# EAGLE board CapGrid4x4V1 (EAGLE 6.5.0)
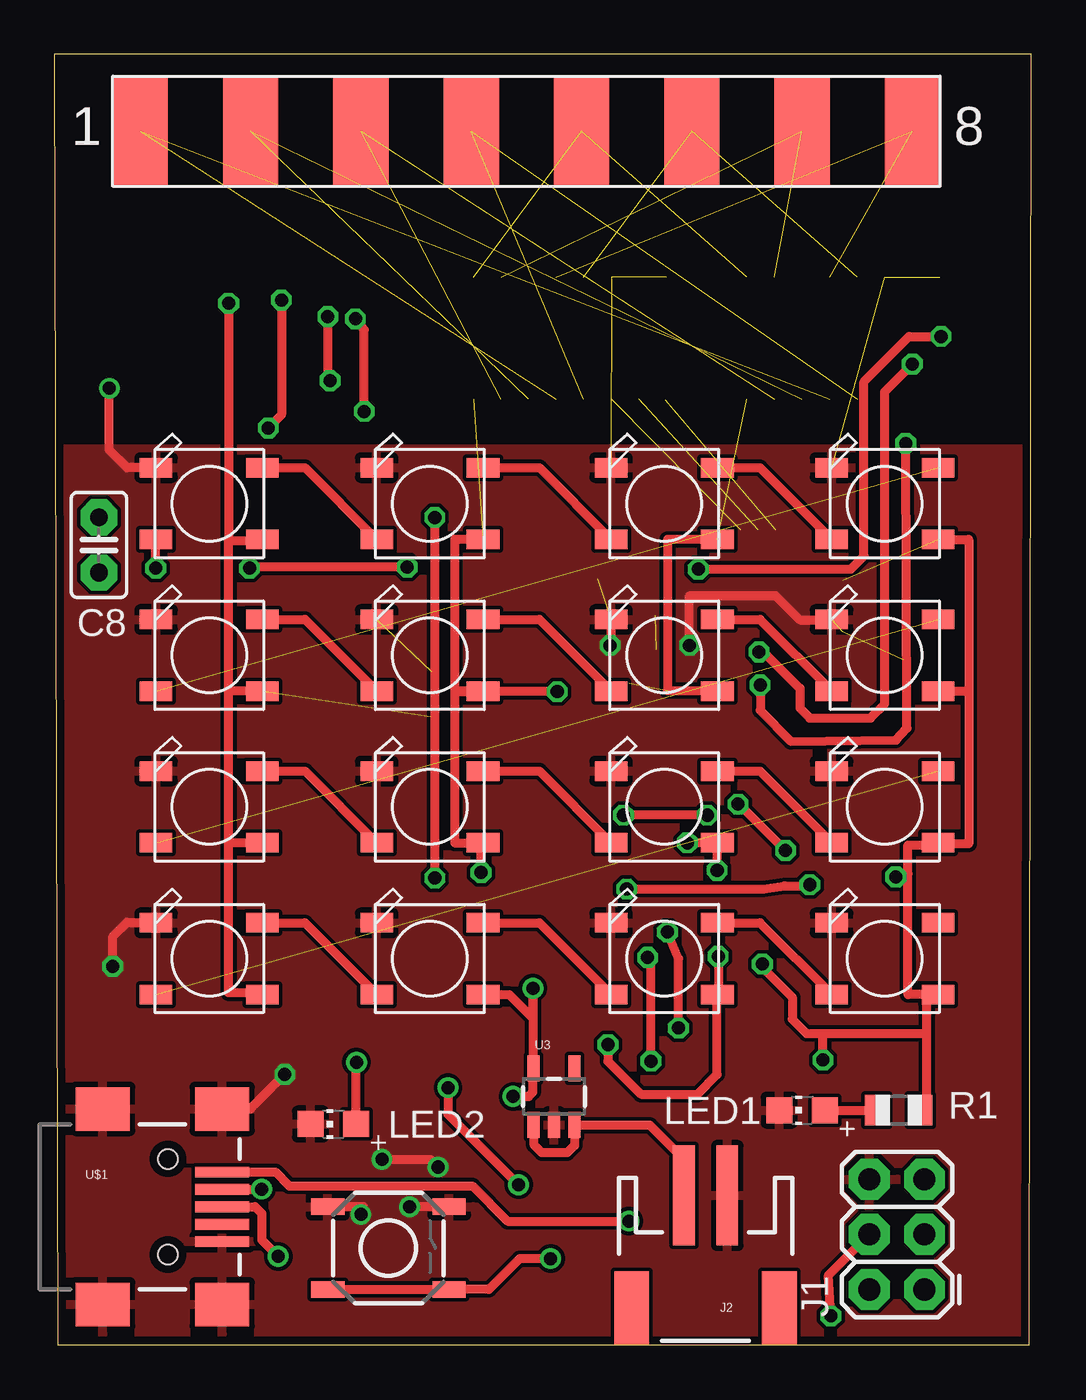
[diagram p0: board, top side]
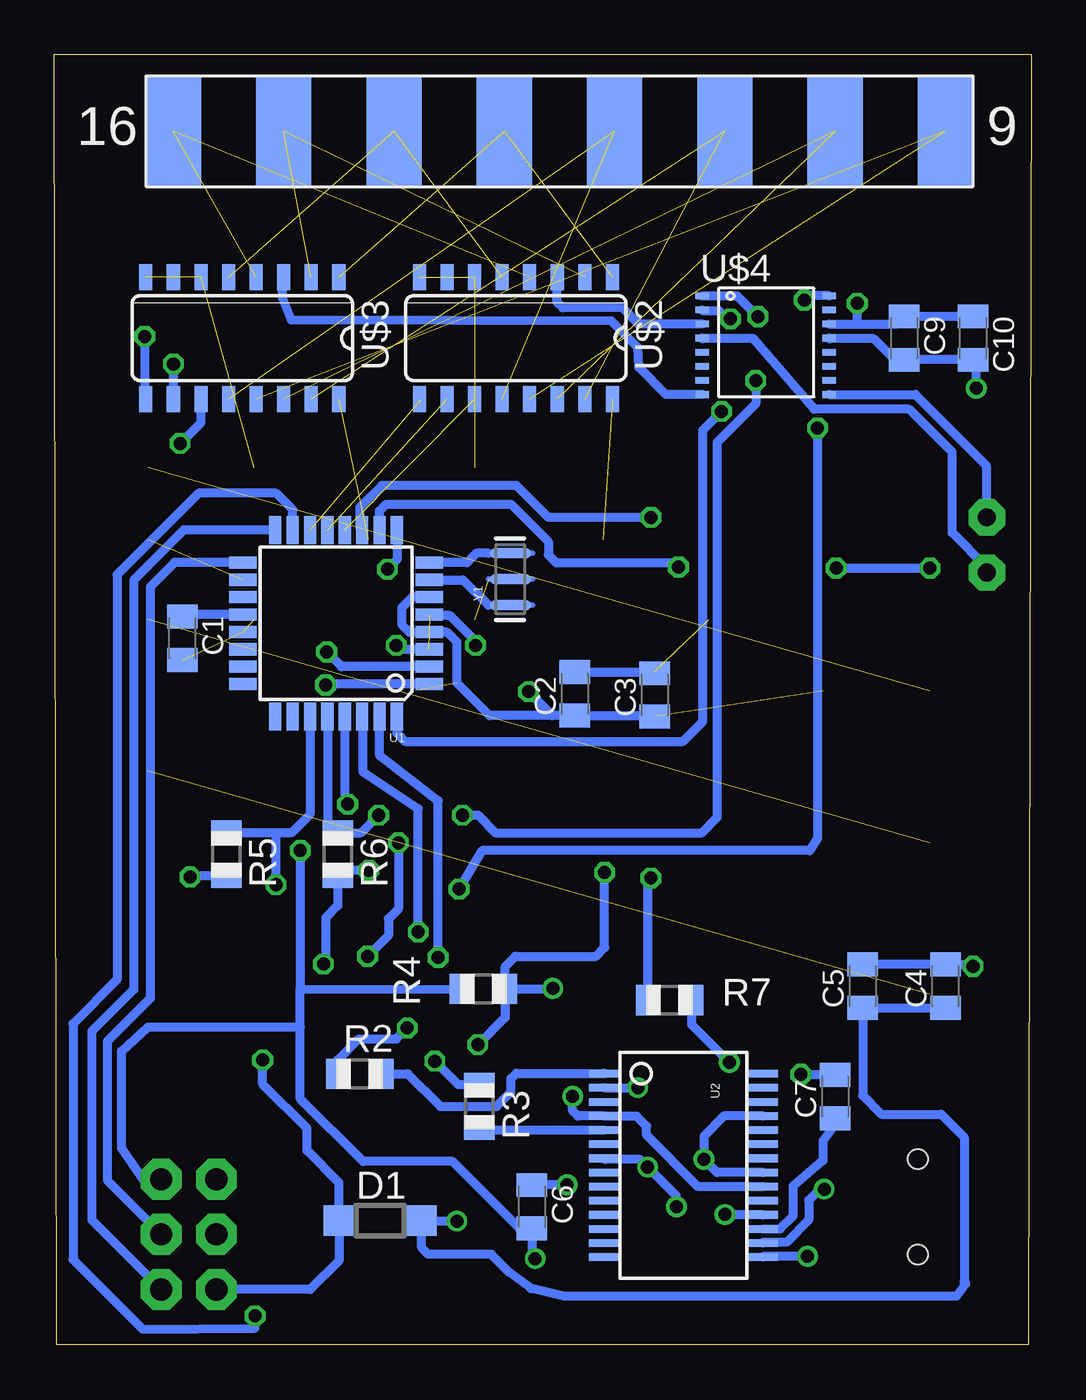
[diagram p1: board, bottom side, seen from below]

Size 45.01 x 59.43 mm. Coordinates in mm from the lower left corner, seen from the top.
Outline: 0.15,0 44.91,0 45.01,59.43 0,59.43 0.15,0
Copper layers (1*16): Top 0.0356mm / dielectric 1.5011mm / Bottom 0.0356mm
Design rules "LaenPCBOrder": minimum track width 6mil, minimum drill 13mil, track to track 6mil, track to pad 6mil, pad to pad 6mil, via to via 6mil, smd to smd 6mil, copper to edge 15mil, drill to drill 6mil, minimum pad ring 7mil, minimum via ring 7mil, stop-mask expansion 3mil, vias tented up to drill 0mil, thermal gap 10mil
Net classes: 0 default: width 0.152 mm, drill 0.33 mm, clearance 0.178 mm

## Footprints (pad centres in the part's own frame; a part is rotated, then mirrored left to right if it is on the bottom)
C0805K = smd 1.1 x 1.4: 1 -1,0; 2 1,0
C025-025X050 = drill 0.813 pad 1.676 octagon: 1 -1.27,0; 2 1.27,0
SOD123 = smd 1.4 x 1.4: A 1.9,0; C -1.9,0
2X3 = drill 1.016 pad 1.88 octagon: 1 0,0; 2 0,2.54; 3 2.54,0; 4 2.54,2.54; 5 5.08,0; 6 5.08,2.54
JST-2-SMD = smd 1 x 4.6: 1 -1,-3.7; 2 1,-3.7 | smd 1.6 x 3.4: NC1 -3.4,1.5; NC2 3.4,1.5
WS2812B = smd 1.5 x 0.9: 1-VDD 2.45,-1.65; 2-DOUT 2.45,1.65; 3-GND -2.45,1.65; 4-DIN -2.45,-1.65
CHIP-LED0805 = smd 1.2 x 1.2: A 0,-1.05; C 0,1.05
R0805 = smd 1.1 x 1.4: 1 -1,0; 2 1,0
TACTILE-SWITCH-SMD = smd 1.524 x 0.762: 1 -2.794,1.905; 2 2.794,1.905; 3 -2.794,-1.905; 4 2.794,-1.905
TQFP32-08 = smd 1.27 x 0.559: 1 -4.293,2.8; 2 -4.293,2; 3 -4.293,1.2; 4 -4.293,0.4; 5 -4.293,-0.4; 6 -4.293,-1.2; 7 -4.293,-2; 8 -4.293,-2.8; 17 4.293,-2.8; 18 4.293,-2; 19 4.293,-1.2; 20 4.293,-0.4; 21 4.293,0.4; 22 4.293,1.2; 23 4.293,2; 24 4.293,2.8 | smd 0.559 x 1.27: 9 -2.8,-4.293; 10 -2,-4.293; 11 -1.2,-4.293; 12 -0.4,-4.293; 13 0.4,-4.293; 14 1.2,-4.293; 15 2,-4.293; 16 2.8,-4.293; 25 2.8,4.293; 26 2,4.293; 27 1.2,4.293; 28 0.4,4.293; 29 -0.4,4.293; 30 -1.2,4.293; 31 -2,4.293; 32 -2.8,4.293
SSOP28DB = smd 0.348 x 1.397: 1 -4.225,-3.656; 2 -3.575,-3.656; 3 -2.925,-3.656; 4 -2.275,-3.656; 5 -1.625,-3.656; 6 -0.975,-3.656; 7 -0.325,-3.656; 8 0.325,-3.656; 9 0.975,-3.656; 10 1.625,-3.656; 11 2.275,-3.656; 12 2.925,-3.656; 13 3.575,-3.656; 14 4.225,-3.656; 15 4.225,3.656; 16 3.575,3.656; 17 2.925,3.656; 18 2.275,3.656; 19 1.625,3.656; 20 0.975,3.656; 21 0.325,3.656; 22 -0.325,3.656; 23 -0.975,3.656; 24 -1.625,3.656; 25 -2.275,3.656; 26 -2.925,3.656; 27 -3.575,3.656; 28 -4.225,3.656
SOT23-5 = smd 0.55 x 1.2: 1 -0.95,-1.3; 2 0,-1.3; 3 0.95,-1.3; 4 0.95,1.3; 5 -0.95,1.3
USB-MINIB = smd 2.5 x 0.5: D+ 2.5,0; D- 2.5,0.8; GND 2.5,-1.6; ID 2.5,-0.8; VBUS 2.5,1.6 | smd 2.5 x 2: MTN1 -3,4.5; MTN2 2.5,4.5; MTN3 -3,-4.5; MTN4 2.5,-4.5 | hole 0.9: 0,2.2; 0,-2.2
SO16 = smd 0.6 x 1.2: 1 -4.445,-2.8; 2 -3.175,-2.8; 3 -1.905,-2.8; 4 -0.635,-2.8; 5 0.635,-2.8; 6 1.905,-2.8; 7 3.175,-2.8; 8 4.445,-2.8; 9 4.445,2.8; 10 3.175,2.8; 11 1.905,2.8; 12 0.635,2.8; 13 -0.635,2.8; 14 -1.905,2.8; 15 -3.175,2.8; 16 -4.445,2.8
AD7746 = smd 0.61 x 0.305: !RDY -2.95,1.3; CIN1(+) -2.95,-2.6; CIN1(-) -2.95,-1.95; CIN2(+) 2.9,-2.6; CIN2(-) 2.9,-1.95; EXCA -2.95,0.65; EXCB -2.95,0; GND 2.9,0; NC 2.9,1.3; REFIN(+) -2.95,-0.65; REFIN(-) -2.95,-1.3; SCL -2.95,1.95; SDA 2.9,1.95; VDD 2.9,0.65; VIN(+) 2.9,-1.3; VIN(-) 2.9,-0.65
CAP8CONN = smd 2.54 x 5.08: 1 -15.24,0; 2 -10.16,0; 3 -5.08,0; 4 0,0; 5 5.08,0; 6 10.16,0; 7 15.24,0; 8 20.32,0 | smd 2.54 x 5.08 bottom: 9 -15.24,0; 10 -10.16,0; 11 -5.08,0; 12 0,0; 13 5.08,0; 14 10.16,0; 15 15.24,0; 16 20.32,0
RESONATOR-SMD = smd 0.45 x 1.905: 1 -1.2,0; 2 0,0; 3 1.2,0

## Placement (x,y rotation side)
C1  0.1uF  [C0805K]  39.12,32.54 270 bottom
C2  1.0uF  [C0805K]  21.03,29.97 90 bottom
C3  0.1uF  [C0805K]  17.35,29.92 90 bottom
C4  10uF  [C0805K]  3.96,16.51 90 bottom
C5  0.1uF  [C0805K]  7.77,16.51 90 bottom
C6  0.1uF  [C0805K]  23.01,6.35 270 bottom
C7  0.1uF  [C0805K]  9.04,11.43 90 bottom
C8  [C025-025X050]  2.06,36.83 270 top
C9  10uF  [C0805K]  5.87,46.35 270 bottom
C10  0.1uF  [C0805K]  2.69,46.35 270 bottom
D1  MBR0520LT  [SOD123]  30,5.71 0 bottom
J1  AVR_SPI_PRG_6PTH  [2X3]  40.08,2.54 90 top
J2  [JST-2-SMD]  30,3.17 180 top
L1  WS2812B  [WS2812B]  7.14,38.73 0 top
L2  WS2812B  [WS2812B]  17.3,38.73 0 top
L3  WS2812B  [WS2812B]  28.09,38.73 0 top
L4  WS2812B  [WS2812B]  38.25,38.73 0 top
L5  WS2812B  [WS2812B]  7.14,31.75 0 top
L6  WS2812B  [WS2812B]  17.3,31.75 0 top
L7  WS2812B  [WS2812B]  28.09,31.75 0 top
L8  WS2812B  [WS2812B]  38.25,31.75 0 top
L9  WS2812B  [WS2812B]  7.14,24.77 0 top
L10  WS2812B  [WS2812B]  17.3,24.77 0 top
L11  WS2812B  [WS2812B]  28.09,24.77 0 top
L12  WS2812B  [WS2812B]  38.25,24.77 0 top
L13  WS2812B  [WS2812B]  7.14,17.78 0 top
L14  WS2812B  [WS2812B]  17.3,17.78 0 top
L15  WS2812B  [WS2812B]  28.09,17.78 0 top
L16  WS2812B  [WS2812B]  38.25,17.78 0 top
LED1  BLUE  [CHIP-LED0805]  34.44,10.79 90 top
LED2  GREEN  [CHIP-LED0805]  12.85,10.16 90 top
R1  680  [R0805]  38.89,10.79 180 top
R2  1k  [R0805]  30.94,12.47 0 bottom
R3  1k  [R0805]  25.43,10.97 270 bottom
R4  1k  [R0805]  25.25,16.38 0 bottom
R5  10k  [R0805]  37.08,22.58 270 bottom
R6  10k  [R0805]  31.95,22.58 270 bottom
R7  680  [R0805]  16.66,15.88 0 bottom
S1  [TACTILE-SWITCH-SMD]  15.39,4.45 0 top
U1  ATMEGA328P  [TQFP32-08]  32.03,33.22 180 bottom
U2  FT232RLSSOP  [SSOP28DB]  16.03,8.26 270 bottom
U3  MIC5219 5V  [SOT23-5]  23.01,11.43 0 top
U$1  USB-MINIB-5PIN  [USB-MINIB]  5.23,6.35 0 top
U$2  74HC4051_MUX  [SO16]  23.75,46.35 180 bottom
U$3  74HC4051_MUX  [SO16]  36.35,46.35 180 bottom
U$4  AD7746  [AD7746]  12.22,46.35 0 bottom
U$5  CAP8CONN  [CAP8CONN]  19.2,55.88 0 top
Y1  16MHZ  [RESONATOR-SMD]  24,35.26 90 bottom

## Library data of the parts
C1-C10 L1-L16 LED1 LED2 R1-R7 = adafruit
D1 = diode
J1 U$1 = SparkFun-Connectors
J2 = SparkFun-Connectors; PROD_ID: CONN-08352
S1 = SparkFun-Electromechanical
U1 = SparkFun-DigitalIC; PROD_ID: IC-09069
U2 = SparkFun-DigitalIC; PROD_ID: IC-00870
U3 = SparkFun-PowerIC; PROD_ID: VREG-10107
U$2 U$3 = SparkFun-AnalogIC
U$4 U$5 = SBLib
Y1 = SparkFun-FreqCtrl; PROD_ID: XTAL-08900

## Nets
3V3: C7.1 U2.17
5V: C2.1 C3.1 C9.1 C10.1 D1.C J1.2 L1.1-VDD L2.1-VDD L3.1-VDD L4.1-VDD L5.1-VDD L6.1-VDD L7.1-VDD L8.1-VDD L9.1-VDD L10.1-VDD L11.1-VDD L12.1-VDD L13.1-VDD L14.1-VDD L15.1-VDD L16.1-VDD R1.1 R4.2 R5.2 R6.2 U1.4 U1.6 U1.18 U2.4 U2.20 U3.5 U$2.16 U$3.16 U$4.VDD
BCAP1: U$3.13 U$5.9
BCAP2: U$3.14 U$5.10
BCAP3: U$3.15 U$5.11
BCAP4: U$3.12 U$5.12
BCAP5: U$3.1 U$5.13
BCAP6: U$3.5 U$5.14
BCAP7: U$3.2 U$5.15
BCAP8: U$3.4 U$5.16
CAPINT: U1.32 U$4.!RDY
CIN: U$3.3 U$4.CIN1(+)
EXC: U$2.3 U$4.EXCA
EXCTEST: C8.2 U$4.EXCB
GND: C1.2 C2.2 C3.2 C4.2 C5.2 C7.2 C9.2 C10.2 J1.6 J2.1 L1.3-GND L2.3-GND L3.3-GND L4.3-GND L5.3-GND L6.3-GND L7.3-GND L8.3-GND L9.3-GND L10.3-GND L11.3-GND L12.3-GND L13.3-GND L14.3-GND L15.3-GND L16.3-GND LED1.C LED2.C S1.1 S1.2 U1.3 U1.5 U1.21 U2.7 U2.18 U2.21 U2.25 U3.2 U$1.GND U$1.MTN1 U$1.MTN2 U$1.MTN3 U$1.MTN4 U$2.6 U$2.7 U$2.8 U$3.6 U$3.7 U$3.8 U$4.GND Y1.2
LEDARRAY: L1.4-DIN U1.10
MISO: J1.1 U1.16
MOSI: J1.4 U1.15
MUX1A0: U1.12 U$2.11
MUX1A1: U1.13 U$2.10
MUX1A2: U1.14 U$2.9
MUX2A0: U1.1 U$3.11
MUX2A1: U1.2 U$3.10
MUX2A2: U1.9 U$3.9
N$1: R2.1 U1.30
N$2: C6.1 U2.2
N$3: R3.1 U1.31
N$4: U1.7 Y1.1
N$5: R7.1 U1.11
N$6: U1.8 Y1.3
N$7: C1.1 U1.20
N$8: LED1.A R1.2
N$9: LED2.A R7.2
N$10: L4.2-DOUT L5.4-DIN
N$11: L10.2-DOUT L11.4-DIN
N$14: L1.2-DOUT L2.4-DIN
N$15: L2.2-DOUT L3.4-DIN
N$16: L3.2-DOUT L4.4-DIN
N$18: L5.2-DOUT L6.4-DIN
N$19: L6.2-DOUT L7.4-DIN
N$20: L7.2-DOUT L8.4-DIN
N$21: L8.2-DOUT L9.4-DIN
N$22: L9.2-DOUT L10.4-DIN
N$24: L11.2-DOUT L12.4-DIN
N$25: L12.2-DOUT L13.4-DIN
N$26: L13.2-DOUT L14.4-DIN
N$27: L14.2-DOUT L15.4-DIN
N$28: L15.2-DOUT L16.4-DIN
N$29: C8.1 U$4.CIN2(+)
RESET: C6.2 J1.5 R4.1 S1.3 S1.4 U1.29
RX: R2.2 U2.1
SCK: J1.3 U1.17
SCL: R6.1 U1.28 U$4.SCL
SDA: R5.1 U1.27 U$4.SDA
TCAP1: U$2.13 U$5.1
TCAP2: U$2.14 U$5.2
TCAP3: U$2.15 U$5.3
TCAP4: U$2.12 U$5.4
TCAP5: U$2.1 U$5.5
TCAP6: U$2.5 U$5.6
TCAP7: U$2.2 U$5.7
TCAP8: U$2.4 U$5.8
TX: R3.2 U2.5
USBDM: U2.16 U$1.D-
USBDP: U2.15 U$1.D+
V+: J2.2 U3.1 U3.3
VUSB: C4.1 C5.1 D1.A U$1.VBUS

## Tracks (layer width: path | path; a pad name or v marks a point on that pad's centre or on a via)
3V3
  Bottom 0.406: C7.1 9.04,10.16 9.6,9.4 9.6,8.48 10.97,7.32 10.97,5.94 11.59,5.33 U2.17
5V  (via drill 0.6)  (5 unrouted)
  Top 0.406: L14.1-VDD 20.95,16.13 22.05,15.04 v22.05,16.41 22.05,12.74 U3.5 22.05,12.71 22.05,11.63 21.84,11.43 v21.13,11.43 | L5.1-VDD 8.03,30.1 | 8.03,30.1 8.03,37.03 | 8.03,37.03 9.59,37.03 L1.1-VDD | L9.1-VDD 8.03,23.11 | 8.03,23.11 8.03,30.1 | L13.1-VDD 9.45,16.13 9.45,16.2 8.03,16.2 8.03,23.11 | v8.03,47.95 8.03,37.03 | L2.1-VDD 18.44,37.09 18.44,30.07 19.75,30.07 L6.1-VDD | L6.1-VDD 18.44,30.1 18.44,23.11 L10.1-VDD 19.66,23.03 v19.66,21.74 | v29.16,23.11 L11.1-VDD 30.53,23.11 v30.53,21.84 | v30.58,17.88 30.58,16.17 L15.1-VDD 30.53,16.12 30.53,12.45 29.62,11.53 27.03,11.53 25.5,13.06 v25.5,13.82 | L16.1-VDD 40.18,16.13 | 40.18,16.13 39.32,16.13 39.32,21.69 | 39.32,21.69 39.32,23.01 40.7,23.01 L12.1-VDD 40.7,23.06 42.11,23.06 42.11,30.1 | L8.1-VDD 42.11,30.1 | L4.1-VDD 42.11,37.09 42.11,30.1 | R1.1 40.18,10.79 40.18,14.43 | 40.18,14.43 40.18,16.13 | L3.1-VDD 28.24,37.09 28.24,30.12 30.54,30.12 L7.1-VDD | v32.61,17.53 32.61,17.37 33.99,16 33.99,14.99 34.65,14.33 35.46,14.33 | 35.46,14.33 40.08,14.33 40.18,14.43 | v38.76,21.54 39.17,21.54 39.32,21.69 | v23.16,30.07 19.77,30.07 L6.1-VDD | v35.41,13.11 35.41,14.28 35.46,14.33
  Bottom 0.406: J1.2 33.22,2.54 31.9,3.87 D1.C 31.9,7.46 33.38,8.94 33.38,9.96 35.41,11.99 v35.41,13.11 | C10.1 C9.1 6.22,47.01 U$4.VDD 8.03,47.01 v8.03,47.95 | R4.2 22.38,16.38 v22.05,16.41 | v21.13,11.43 21.13,10.77 20.89,10.53 U2.4 19.67,10.52 18.19,10.52 17.73,10.06 17.73,9.65 15.36,7.28 U2.20 | C2.1 17.4,28.97 C3.1 | C2.1 24.96,28.97 26.47,30.48 26.47,32.36 26.92,32.82 U1.4 27.74,32.82 28.65,32.82 29.01,33.17 29.01,33.93 28.52,34.42 U1.6 | v29.16,23.11 29.16,20.07 29.62,19.61 29.62,18.85 v30.58,17.88 | R4.2 24.25,17.41 23.77,17.88 20.07,17.88 19.66,18.29 v19.66,21.74 | R4.2 24.25,15.07 v25.5,13.82 | v30.53,21.84 31.69,21.84 R6.2 31.95,20.22 32.51,19.66 32.51,17.63 v32.61,17.53 | R5.2 38.72,21.58 v38.76,21.54 | C2.1 22.06,28.97 v23.16,30.07
BCAP1  (1 unrouted)
BCAP2  (1 unrouted)
BCAP3  (1 unrouted)
BCAP4  (1 unrouted)
BCAP5  (1 unrouted)
BCAP6  (1 unrouted)
BCAP7  (1 unrouted)
BCAP8  (1 unrouted)
CAPINT  (via drill 0.6)
  Top 0.406: v14.27,42.98 14.27,46.74 v13.87,47.24
  Bottom 0.406: U1.32 29.23,28.16 28.85,27.79 16.05,27.79 15.14,28.7 15.14,42.11 v14.27,42.98 | v13.87,47.24 13.92,47.14 14.38,47.6 15.11,47.6 U$4.!RDY
CIN
  Bottom 0.406: U$4.CIN1(+) 16.83,43.76 18.08,45.01 18.14,45.92 19.35,47.14 34.09,47.19 34.49,48.21 34.49,49.1 U$3.3
EXC
  Bottom 0.406: U$4.EXCA 18.1,47.01 18.85,47.75 21.59,47.75 21.84,48.01 U$2.3
EXCTEST
  Bottom 0.406: C8.2 2.06,35.79 3.66,37.39 3.66,41.1 5.64,43.08 10.01,43.08 12.8,46.33 15.14,46.33 U$4.EXCB
GND  (via drill 0.6)  (11 unrouted)
  Top 0.406: L1.3-GND 3.35,40.38 2.54,41.2 v2.54,44.04 | v14.12,5.99 14.12,6.25 14.22,6.35 S1.1 | S1.2 v16.36,6.35 | v15.09,8.53 17.32,8.53 v17.68,8.18 | U$1.MTN2 9.02,10.85 v10.62,12.45 | L7.3-GND 25.64,32.25 v25.6,32.21 | v29.26,32.21 29.26,34.49 33.22,34.49 34.34,33.38 35.78,33.38 L8.3-GND | v2.69,17.42 2.69,18.8 3.35,19.46 4.66,19.46 L13.3-GND
  Bottom 0.406: C5.2 C4.2 2.78,17.51 v2.69,17.42 | U$4.GND 9.29,46.33 7.26,46.33 6.29,45.35 C9.2 C10.2 2.54,45.2 v2.54,44.04 | U2.18 14.11,5.98 v14.12,5.99 | v16.36,6.35 16.36,6.86 v17.68,8.18 18.03,8.53 19.64,8.53 U2.7 | U2.21 14.48,7.93 v15.09,8.53 15.09,9.6 14.16,10.53 U2.25 | C2.2 17.4,30.97 C3.2 | v10.62,12.45 9.06,12.45 C7.2 | v25.6,32.21 25.6,32.41 26.77,33.58 27.69,33.58 U1.5 | U1.3 29.08,32.02 v29.26,32.21
  pour Top: -0.48,41.27 45.87,41.27 45.87,-0.64 -0.48,-0.64
LEDARRAY  (via drill 0.6)
  Top 0.406: v16.26,35.81 9.04,35.81 v8.99,35.76 | v4.67,35.76 4.67,37.07 L1.4-DIN
  Bottom 0.406: U1.10 30.03,38.4 29.72,38.71 23.98,38.71 22.25,36.98 22.25,36.37 21.89,36.02 16.46,36.02 v16.26,35.81 | v8.99,35.76 v4.67,35.76
MISO
  Bottom 0.406: U1.16 39.04,37.52 41.35,35.2 41.35,16.36 43.28,14.43 43.28,5.74 J1.1
MOSI  (via drill 0.6)
  Top 0.406: v35.76,1.32 35.66,3.2 J1.4
  Bottom 0.406: U1.15 34.03,38.45 34.8,39.22 38.35,39.22 42.11,35.46 42.11,16.82 44.15,14.78 44.15,3.91 40.94,0.71 35.76,0.76 v35.76,1.32
MUX1A0  (1 unrouted)
MUX1A1  (1 unrouted)
MUX1A2  (1 unrouted)
  Bottom 0.406: 28.14,43.5 U$2.9
MUX2A0  (via drill 0.6)
  Top 0.406: v32.51,30.38 32.51,29.21 33.93,27.79 38.76,27.84 39.27,28.4 v39.22,41.5
  Bottom 0.406: U1.1 32.47,30.42 v32.51,30.38 | U$3.11 38.25,42.47 v39.22,41.5
MUX2A1  (via drill 0.6)
  Top 0.406: v32.46,31.9 32.66,31.9 34.34,30.23 34.34,29.31 34.8,28.85 37.59,28.85 38.25,29.52 38.25,43.89 v39.52,45.16
  Bottom 0.406: U1.2 31.78,31.22 v32.46,31.9 | v39.52,45.16 U$3.10
MUX2A2  (via drill 0.6)
  Top 0.406: v29.67,35.71 36.68,35.71 37.29,36.32 37.29,44.35 39.37,46.43 v40.84,46.43
  Bottom 0.406: U1.9 29.23,36.15 v29.67,35.71 | v40.84,46.43 40.84,43.61 U$3.9
N$1  (via drill 0.6)
  Top 0.406: v28.75,14.58 28.75,17.78 v28.24,19
  Bottom 0.406: R2.1 31.94,13.12 30.99,14.07 29.26,14.07 v28.75,14.58 | v28.24,19 28.24,24.69 30.78,26.36 30.78,28.89 U1.30
N$2  (via drill 0.6)
  Top 0.406: v18.14,11.84 18.14,10.62 v21.39,7.37
  Bottom 0.406: U2.2 v18.14,11.83 v18.14,11.84 | v21.39,7.37 23,7.37 C6.1
N$3  (via drill 0.6)
  Top 0.406: v27.48,13.06 27.48,17.68 v27.33,17.83
  Bottom 0.406: R3.1 26.4,11.97 v27.48,13.06 | v27.33,17.83 27.33,25.04 30.02,27.13 U1.31
N$4
  Bottom 0.406: U1.7 26.19,35.22 25.02,34.05
N$5  (via drill 0.6)
  Top 0.406: v17.53,21.49 v17.53,38.1
  Bottom 0.406: R7.1 17.66,21.35 v17.53,21.49 | v17.53,38.1 22.25,38.1 23.72,39.57 29.92,39.57 30.94,38.56 30.94,37.62 U1.11
N$6
  Bottom 0.406: 25.02,36.45 25.57,36.45 26.01,36.02 U1.8
N$7
  Bottom 0.406: U1.20 39.03,33.62 C1.1
N$8
  Top 0.406: LED1.A R1.2
N$9  (via drill 0.6)
  Top 0.406: LED2.A 13.9,12.99 v13.92,13.01
  Bottom 0.406: R7.2 15.66,14.75 v13.92,13.01
N$10  (1 unrouted)
N$11
  Top 0.406: L10.2-DOUT 22.34,26.41 L11.4-DIN
N$14
  Top 0.406: L1.2-DOUT 11.55,40.38 L2.4-DIN
N$15
  Top 0.406: L2.2-DOUT 22.34,40.38 L3.4-DIN
N$16
  Top 0.406: L3.2-DOUT 32.5,40.38 L4.4-DIN
N$18
  Top 0.406: L5.2-DOUT 11.55,33.4 L6.4-DIN
N$19
  Top 0.406: L6.2-DOUT 22.34,33.4 L7.4-DIN
N$20
  Top 0.406: L7.2-DOUT 32.5,33.4 L8.4-DIN
N$21  (1 unrouted)
N$22
  Top 0.406: L9.2-DOUT 11.55,26.41 L10.4-DIN
N$24
  Top 0.406: L11.2-DOUT 32.5,26.41 L12.4-DIN
N$25  (1 unrouted)
N$26
  Top 0.406: L13.2-DOUT 11.55,19.43 L14.4-DIN
N$27
  Top 0.406: L14.2-DOUT 22.34,19.43 L15.4-DIN
N$28
  Top 0.406: L15.2-DOUT 32.5,19.43 L16.4-DIN
N$29
  Bottom 0.406: U$4.CIN2(+) 5.35,43.76 2.08,40.49 2.08,38.12 C8.1
RESET  (via drill 0.6)
  Top 0.406: S1.3 S1.4 20.02,2.54 21.44,3.96 v22.86,3.96 | v31.5,24.89 31.6,24.84 v33.68,22.76
  Bottom 0.406: v22.86,3.96 23.01,4.12 C6.2 23.59,5.35 26.67,8.43 30.78,8.43 33.68,11.33 33.68,14.63 | J1.5 40.89,7.57 41.91,9.04 41.91,13.51 40.69,14.63 33.68,14.63 | 33.68,14.63 33.69,16.36 33.63,16.36 | 33.63,16.36 R4.1 | U1.29 31.63,25.08 v31.5,24.89 | v33.68,22.76 33.68,16.41 33.63,16.36
RX
  Bottom 0.406: R2.2 28.73,12.47 27.23,10.97 24.64,10.97 23.98,11.63 23.98,12.24 23.72,12.5 19.7,12.5 U2.1
SCK
  Bottom 0.406: U1.17 39.47,36.02 40.59,34.9 40.59,15.95 42.57,13.97 42.57,7.57 J1.3
SCL  (via drill 0.6)
  Top 0.406: v12.6,47.35 12.6,44.5 v12.7,44.4 | v30.07,24.38 v26.21,24.38
  Bottom 0.406: U1.28 32.43,24.06 R6.1 30.89,23.57 v30.07,24.38 | U$4.SCL 13.56,48.3 v12.6,47.35 | v12.7,44.4 12.7,43.33 14.48,41.55 14.48,24.28 15.19,23.57 24.69,23.57 25.5,24.38 v26.21,24.38
SDA  (via drill 0.6)
  Top 0.406: v10.46,48.11 10.46,42.82 v9.86,42.22 | v26.37,20.98 32.66,20.98 33.63,21.13 34.75,21.13 v34.8,21.18
  Bottom 0.406: U1.27 33.23,24.43 34.09,23.57 34.65,23.57 | 34.65,23.57 R5.1 | U$4.SDA 10.27,48.3 v10.46,48.11 | v9.86,42.22 9.86,23.32 10.21,22.76 25.3,22.76 v26.37,20.98 | v34.8,21.18 34.8,23.42 34.65,23.57
TCAP1  (1 unrouted)
TCAP2  (1 unrouted)
TCAP3  (1 unrouted)
TCAP4  (1 unrouted)
TCAP5  (1 unrouted)
TCAP6  (1 unrouted)
TCAP7  (1 unrouted)
TCAP8  (1 unrouted)
TX
  Bottom 0.406: U2.5 25.33,9.88 R3.2
USBDM  (via drill 0.6)
  Top 0.406: U$1.D- 9.54,7.15 v9.55,7.16
  Bottom 0.406: v9.55,7.16 9.75,7.16 10.26,6.66 10.26,5.74 11.28,4.72 12.33,4.72 U2.16
USBDP  (via drill 0.6)
  Top 0.406: U$1.D+ 9.25,6.35 9.55,6.04 9.55,4.83 v10.31,4.06
  Bottom 0.406: v10.31,4.06 12.34,4.06 U2.15
V+
  Top 0.406: J2.2 29,8.54 27.43,10.11 23.98,10.11 U3.3 23.96,9.18 23.62,8.84 22.45,8.84 22.1,9.2 22.1,10.09 U3.1
VUSB  (via drill 0.6)
  Top 0.406: U$1.VBUS 10.19,7.95 10.82,7.32 19.25,7.32 20.88,5.69 v26.47,5.69 26.52,5.69
  Bottom 0.406: v26.47,5.69 26.49,5.71 D1.A 28.09,4.47 27.79,4.17 24.89,4.17 24.08,3.35 23.06,2.59 21.54,2.23 3.45,2.23 3.05,2.79 3.05,2.85 3.1,2.9 3.1,9.55 4.17,10.62 6.91,10.62 7.77,11.48 C5.1 C4.1